# Altium PCB PCB1.PcbDoc
Units mm, origin at the board's own origin, x right, y up, seen from the top; angles counter-clockwise.
Board outline 185 x 200 mm, 2 copper layers (Top Layer, Bottom Layer), stack 1.569 mm thick; 38 components, 31 nets, 171 pads, 246 vias.
Unrouted connection lines stored in the file: 13.
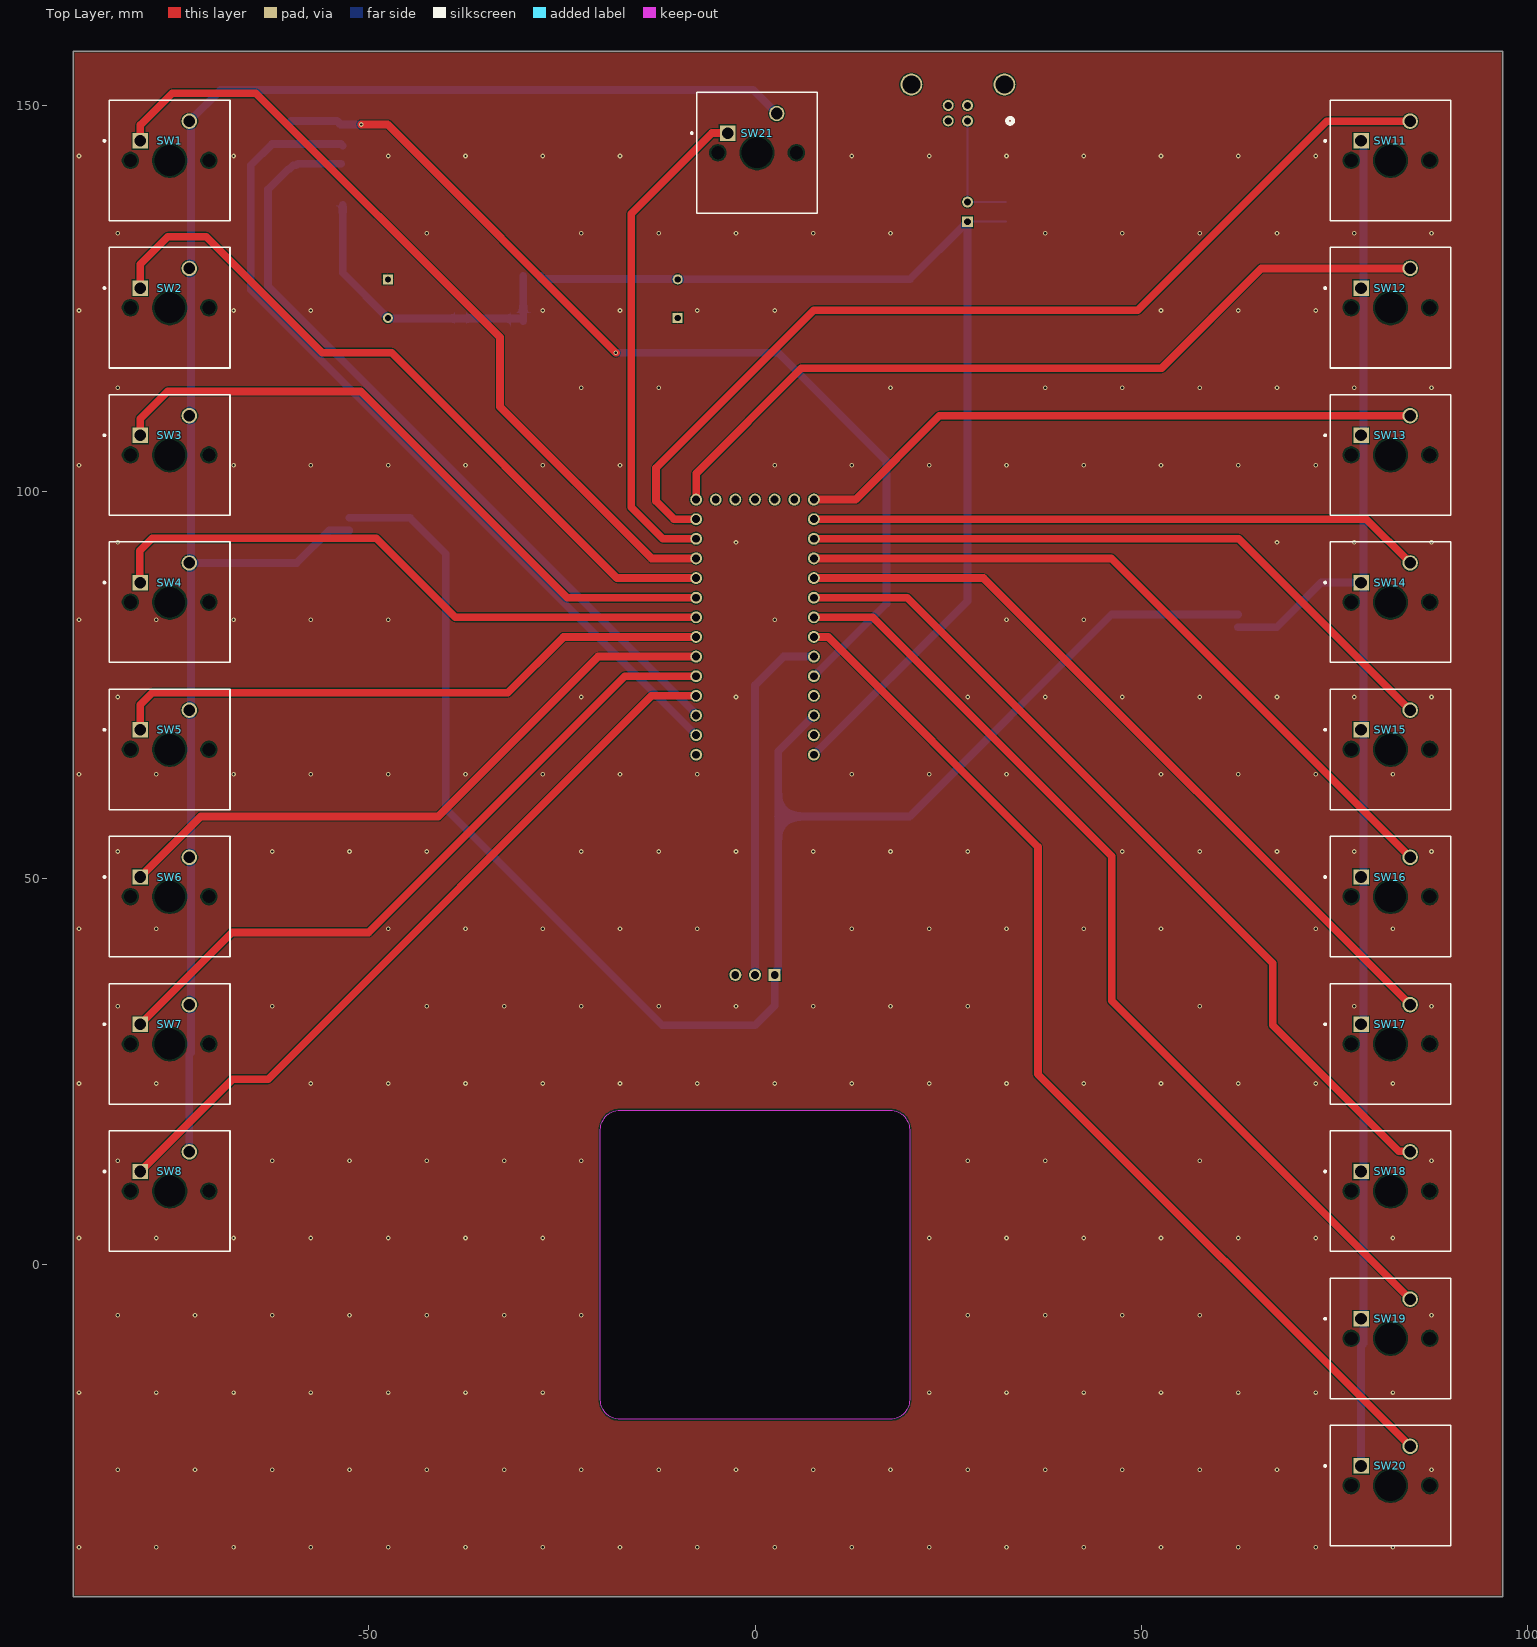
[diagram p0: Top Layer view]
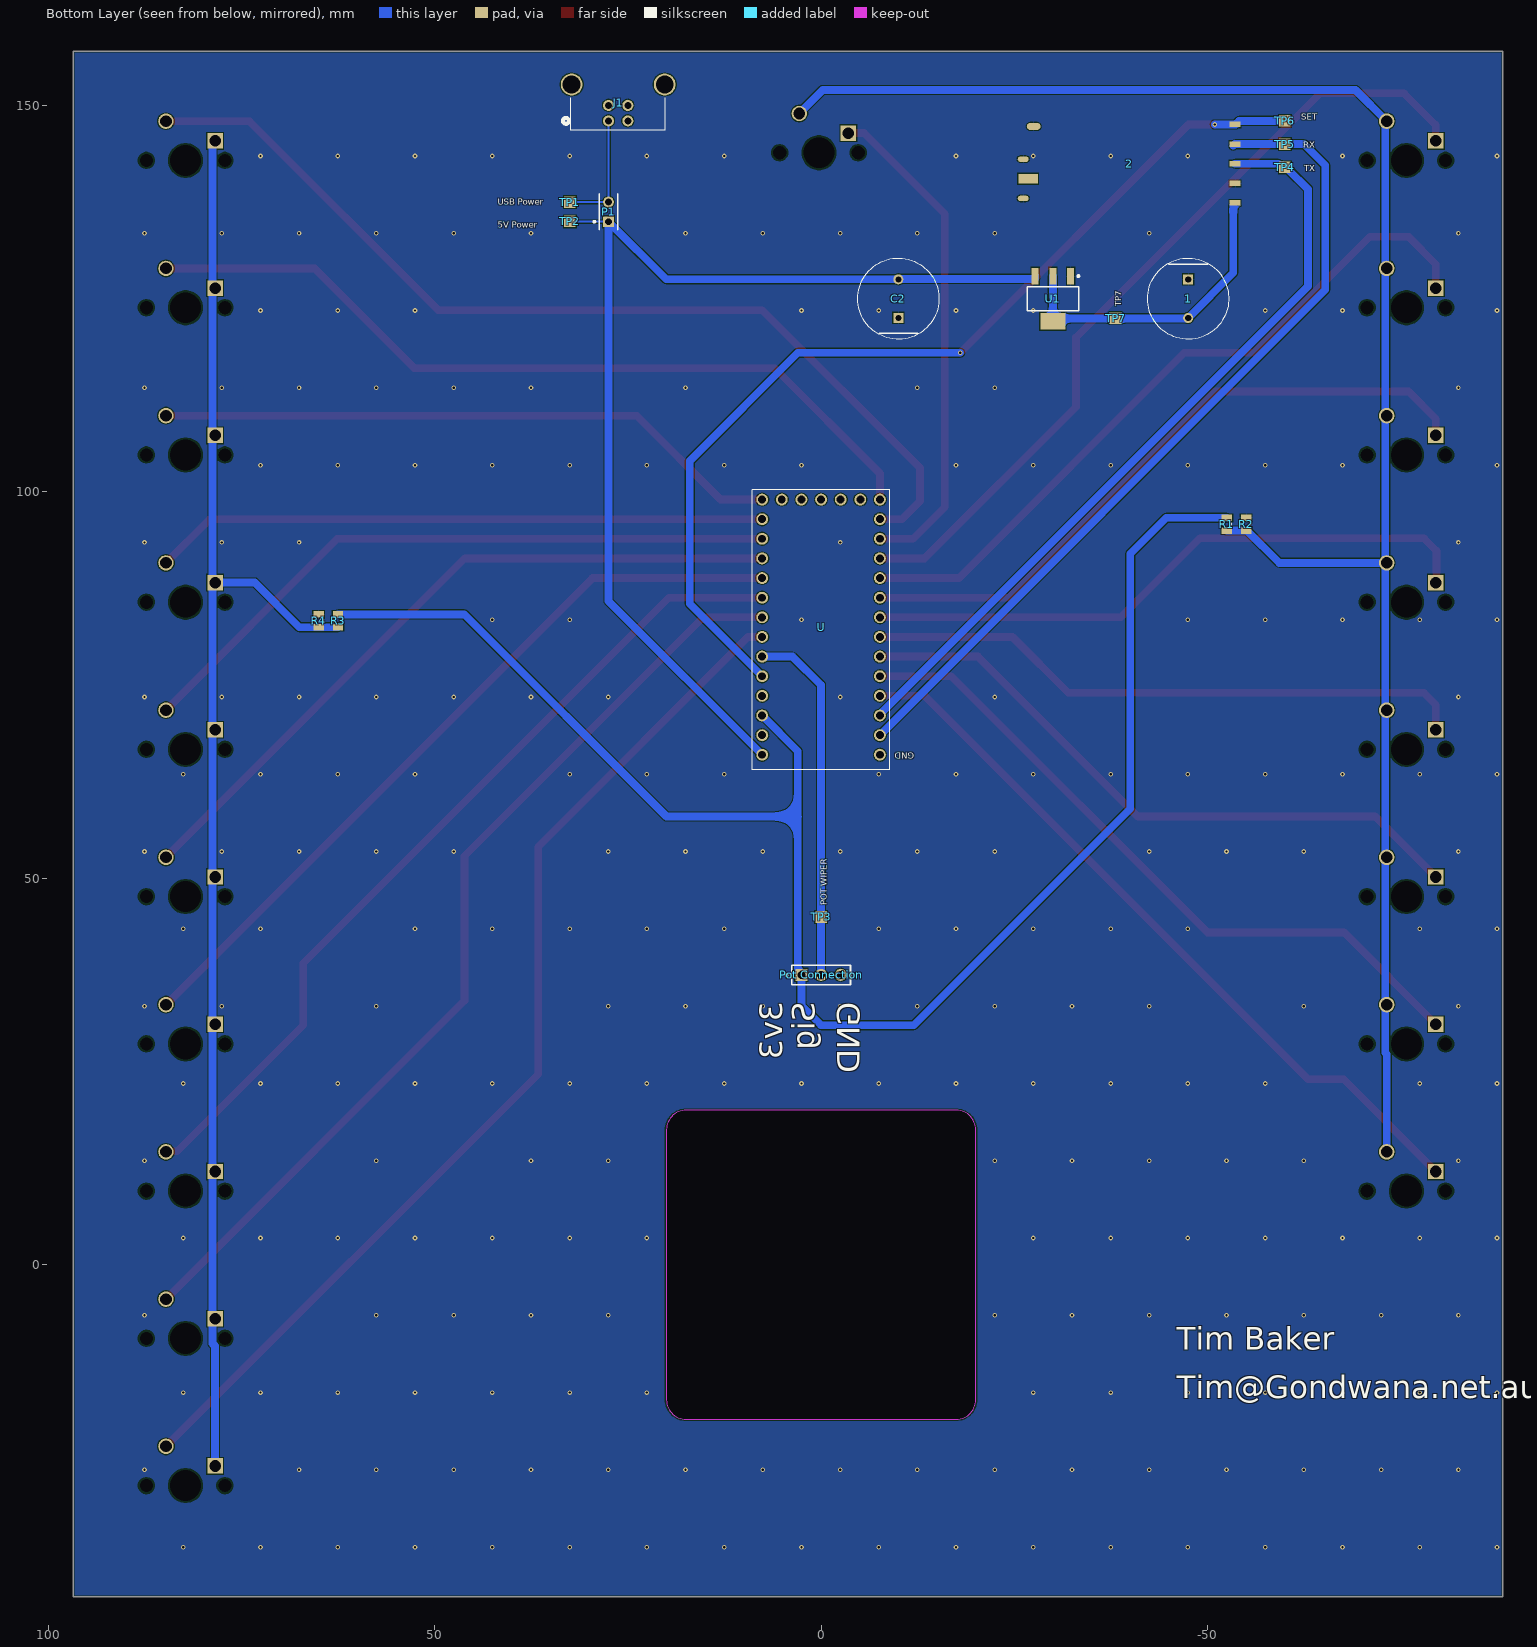
[diagram p1: Bottom Layer view, seen from below]
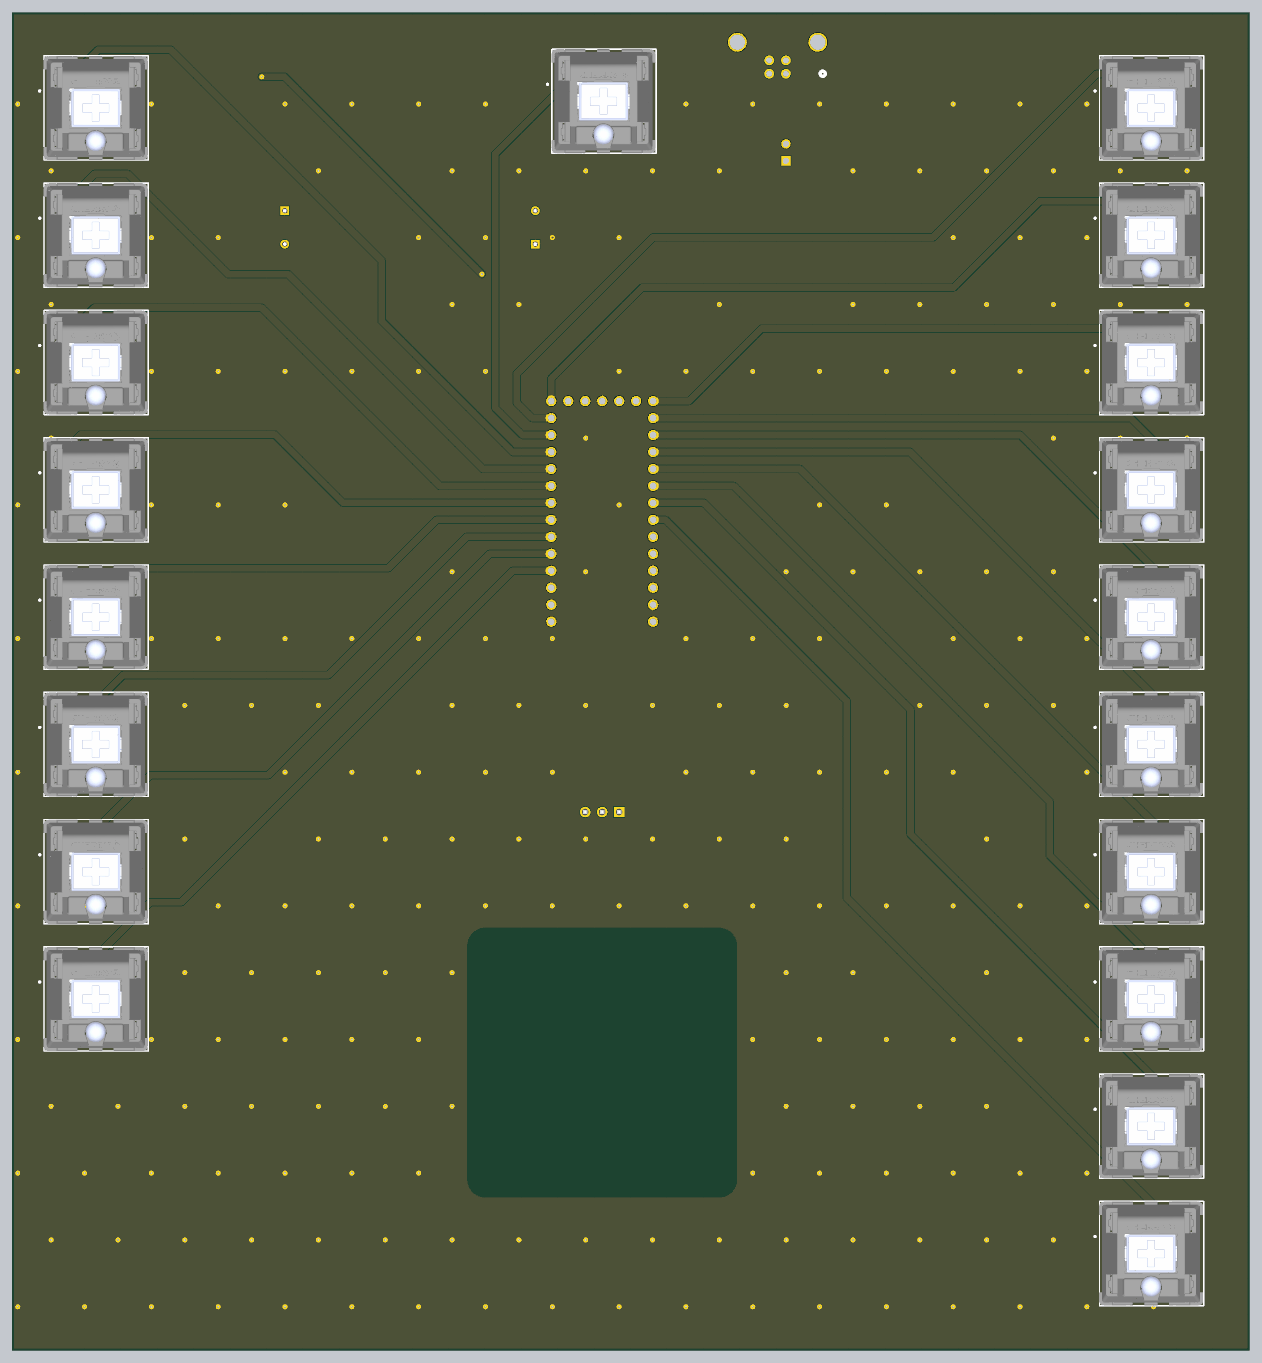
[diagram p2: 3D render of the assembled board from above, using the file's embedded part models]

## Layer stack, top to bottom
Top Solder: solder mask 0.0254, SM-001, Dk 4
Top Layer: signal copper 0.035
Dielectric 1: core 1.4986, Core-043, Dk 4.3
Bottom Layer: signal copper 0.035
Bottom Solder: solder mask 0.0254, SM-001, Dk 4

## Board outline
-88.227,-42.97 -88.227,157.03 96.773,157.03 96.773,-42.97
cut-out: -20,17.46 cw(c-17.46,17.46) -17.46,20 17.46,20 cw(c17.46,17.46) 20,17.46 20,-17.46 cw(c17.46,-17.46) 17.46,-20 -17.46,-20 cw(c-17.46,-17.46) -20,-17.46

## Design rules (kind name [scope] priority, off if disabled: settings)
BoardOutlineClearance [All] p1: gap=0.2 ignorepadtopadclearanceinfootprint=FALSE
Clearance [All] p1: gap=0.127 ignorepadtopadclearanceinfootprint=FALSE except(0.25: Arc-Hole Track-Hole SMDPad-Hole THPad-Hole Via-Hole Fill-Hole Poly-Hole Region-Hole Text-Hole; 0.254: Arc-Poly)
ComponentClearance [All] p1: gap=0.127 collisioncheckmode=3 verticalgap=0.127 showdistances=TRUE
DiffPairsRouting [All] p1: maxlimit=0.254 minlimit=0.127 mostfreqgap=0.127 toplayer_minwidth=0.127 toplayer_maxwidth=25.4 toplayer_prefwidth=0.127 bottomlayer_minwidth=0.127 bottomlayer_maxwidth=25.4 bottomlayer_prefwidth=0.127 maxuncoupledlength=12.7
Height [All] p1: minheight=0 maxheight=1816.048 prefheight=12.7
HoleSize [All] p1: absolutevalues=TRUE maxlimit=6.3 minlimit=0.3 maxpercent=80.000 minpercent=20.000
HoleToHoleClearance [All] p1: gap=0.25 allowstackedmicrovias=FALSE
MinimumAnnularRing [All] p1: minimumring=0.076
MinimumSolderMaskSliver [All] p1: minsoldermaskwidth=0
PlaneClearance [All] p1: clearance=0.127
PlaneConnect PlaneConnectPowerPads [InPadClass('PowerPads')] p1: planeconnectstyle=Direct reliefexpansion=0.508 reliefentries=4 reliefconductorwidth=0.254 reliefairgap=0.254
PlaneConnect [All] p2: pad.planeconnectstyle=Relief pad.reliefexpansion=0.3 pad.reliefentries=4 pad.reliefconductorwidth=0.127 pad.reliefairgap=0.127 via.planeconnectstyle=Direct via.reliefexpansion=0.3 via.reliefentries=4 via.reliefconductorwidth=0.127 via.reliefairgap=0.127
PolygonConnect PolygonConnectPowerPads [All vs (InPadClass('PowerPads'))] p1: connectstyle=Direct reliefconductorwidth=0.254 reliefentries=4 polygonreliefangle="90 Angle" airgapwidth=0.254
PolygonConnect [All] p2: thpad.connectstyle=Relief thpad.reliefconductorwidth=0.127 thpad.reliefentries=4 thpad.polygonreliefangle="90 Angle" thpad.airgapwidth=0.127 smdpad.connectstyle=Relief smdpad.reliefconductorwidth=0.127 smdpad.reliefentries=4 smdpad.polygonreliefangle="90 Angle" smdpad.airgapwidth=0.127 via.connectstyle=Direct via.reliefconductorwidth=0.127 via.reliefentries=4 via.polygonreliefangle="90 Angle" via.airgapwidth=0.127
RoutingVias [All] p1: holewidth=0.3 width=0.6 viastyle="Through Hole" minholewidth=0.3 minwidth=0.6 maxholewidth=0.6 maxwidth=6.6
SilkToSilkClearance [All] p1: silktosilkclearance=0
SilkToSolderMaskClearance [IsPad] p1: minsilkscreentomaskgap=0.127 clearancetoexposedcopper=TRUE
SolderMaskExpansion [All] p1: expansion=0.075 istentingtop=FALSE
Width [All] p1: maxlimit=25.4 minlimit=0.127 preferedwidth=1 minimp=50.000000 maximp=50.000000 favimp=50.000000
20 further rules are at their usual default settings.

## Components (designator, comment, footprint, x,y, rotation, side; value= is the part's Value field where it differs from the comment)
1 "EEUFK1C102" FP-RAD-TH-D_10_0_5-L_16_1-MFG -47.5,125 r270 bottom
2 "HC-12 433MHz module footprint   MCHFIX is for mechanical fix pin which is NC but on this file connected to GND   https://github.com/meendiz/hc-12_si4463/" HC-12_FOOTPRINT -52.29,147.54 r0 bottom
C2 "EEUFK1C102" FP-RAD-TH-D_10_0_5-L_16_1-MFG -10,125 r90 bottom
J1 "MC32596" CONN4_MC32596_MTC 27.5,148 r0 bottom
P1 "5-146280-2" TECO-5-146280-2_V 27.5,136.23 r90 bottom
"Pot Connection" "90120-0763" FP-90120-0763-MFG 0,37.5 r180 bottom
R1 "CRCW08050000Z0EA" RESC2013X50X30LL20T20 -52.5,95.825 r90 bottom
R2 "NF" RESC2013X50X30LL20T20 -55,95.825 r270 bottom
R3 "CRCW08050000Z0EA" RESC2013X50X30LL20T20 62.5,83.325 r90 bottom
R4 "NF" RESC2013X50X30LL20T20 65,83.325 r270 bottom
SW1 "KEYSW-SPST-2" CHRY-MX1A-11NW_V -75.727,142.88 r0 top
SW2 "KEYSW-SPST-2" CHRY-MX1A-11NW_V -75.727,123.83 r0 top
SW3 "KEYSW-SPST-2" CHRY-MX1A-11NW_V -75.727,104.78 r0 top
SW4 "KEYSW-SPST-2" CHRY-MX1A-11NW_V -75.727,85.73 r0 top
SW5 "KEYSW-SPST-2" CHRY-MX1A-11NW_V -75.727,66.68 r0 top
SW6 "KEYSW-SPST-2" CHRY-MX1A-11NW_V -75.727,47.63 r0 top
SW7 "KEYSW-SPST-2" CHRY-MX1A-11NW_V -75.727,28.58 r0 top
SW8 "KEYSW-SPST-2" CHRY-MX1A-11NW_V -75.727,9.53 r0 top
SW11 "KEYSW-SPST-2" CHRY-MX1A-11NW_V 82.219,142.88 r0 top
SW12 "KEYSW-SPST-2" CHRY-MX1A-11NW_V 82.219,123.83 r0 top
SW13 "KEYSW-SPST-2" CHRY-MX1A-11NW_V 82.219,104.78 r0 top
SW14 "KEYSW-SPST-2" CHRY-MX1A-11NW_V 82.219,85.73 r0 top
SW15 "KEYSW-SPST-2" CHRY-MX1A-11NW_V 82.219,66.68 r0 top
SW16 "KEYSW-SPST-2" CHRY-MX1A-11NW_V 82.219,47.63 r0 top
SW17 "KEYSW-SPST-2" CHRY-MX1A-11NW_V 82.219,28.58 r0 top
SW18 "KEYSW-SPST-2" CHRY-MX1A-11NW_V 82.219,9.53 r0 top
SW19 "KEYSW-SPST-2" CHRY-MX1A-11NW_V 82.219,-9.52 r0 top
SW20 "KEYSW-SPST-2" CHRY-MX1A-11NW_V 82.219,-28.57 r0 top
SW21 "KEYSW-SPST-2" CHRY-MX1A-11NW_V 0.273,143.881 r0 top
TP1 "Test Point Square" "New footprint 1" 32.5,137.5 r90 bottom
TP2 "Test Point Square" "New footprint 1" 32.5,135 r90 bottom
TP3 "Test Point Square" "New footprint 1" 0,45 r90 bottom
TP4 "Test Point Square" "New footprint 1" -60,142 r90 bottom
TP5 "Test Point Square" "New footprint 1" -60,145 r90 bottom
TP6 "Test Point Square" "New footprint 1" -60,148 r90 bottom
TP7 "Test Point Square" "New footprint 1" -38.102,122.485 r90 bottom
U "DEV-15583" MODULE_DEV-15583 0,82.5 r0 bottom
U1 "3.3V Regulator 1A output" SOT229P700X180-4N -30,125 r270 bottom

## Footprints (in the part's own frame and the unit in brackets; to place one, negate y for a bottom-side part, rotate by r counter-clockwise, add the part's x,y. Pads: shape width x height; smd on the part's side, far side on the other; paste and mask are expansions set on the pad)
CHRY-MX1A-11NW_V [mm] "THD, 2-Leads, Body 15.6x15.6mm"
  rect 2x2 hole 1.499 paste+0: 1(-3.81,2.54)
  round 2 hole 1.499 paste+0: 2(2.54,5.08)
  round 0 hole 3.988 unplated paste+0: MH1(0,0)
  round 0 hole 1.702 unplated paste+0: MH2(-5.08,0) MH3(5.08,0)
  silkscreen extent -8.57,-7.8 7.8,7.8, body extent -7.87,-7.81 7.73,7.79, height 15.6
CONN4_MC32596_MTC [mil]
  round 56 hole 36 mask+0: 1(0,0) 2(-98.43,0) 3(-98.43,-78.74) 4(0,-78.74)
  round 111 hole 91: 5(-286.22,-185.43) 6(187.8,-185.43)
  silkscreen extent -290,-117 232,48, body extent 0,0 10,10, height 10
FP-90120-0763-MFG [mm]
  rect 1.55x1.55 hole 1 paste-1000 mask+0: 1(-2.54,0)
  round 1.55 hole 1 paste-1000 mask+0: 2(0,0) 3(2.54,0)
  silkscreen extent -4.58,-1.27 3.81,1.27, body extent -3.81,-1.25 3.81,1.25, height 9.65
FP-RAD-TH-D_10_0_5-L_16_1-MFG [mm]
  rect 1.3x1.3 hole 0.8 paste-1000 mask+0: 1(-2.5,0)
  round 1.3 hole 0.8 paste-1000 mask+0: 2(2.5,0)
  silkscreen extent -5.25,-5.25 5.25,5.25, body extent -5,-5.01 4.99,4.99, height 17.5
HC-12_FOOTPRINT [mil]
  rect 100x50 smd: ANT(1003.54,276.77)
  rect 56x28 smd: GND(-50,300) RXD(-50,200) SET(-50,0) TXD(-50,100) VCC(-50,400)
  rrect100% 56x28 smd: GND1(1028.74,376.77) GND2(1028.74,176.77)
  rrect100% 70x36 smd: MCHFIX(975.59,9.84)
MODULE_DEV-15583 [mm]
  round 1.53 hole 1.02: 0(-7.62,13.97) 1(-7.62,11.43) 2(-7.62,8.89) 3(-7.62,6.35) 3.3V_1(-2.54,-16.51) 3.3V_2(7.62,11.43) 4(-7.62,3.81) 5(-7.62,1.27) 6(-7.62,-1.27) 7(-7.62,-3.81) 8(-7.62,-6.35) 9(-7.62,-8.89) 10(-7.62,-11.43) 11(-7.62,-13.97) 12(-7.62,-16.51) 13(7.62,-16.51) 14(7.62,-13.97) 15(7.62,-11.43) 16(7.62,-8.89) 17(7.62,-6.35) 18(7.62,-3.81) 19(7.62,-1.27) 20(7.62,1.27) 21(7.62,3.81) 22(7.62,6.35) 23(7.62,8.89) G1(-7.62,16.51) G2(0,-16.51) G3(7.62,13.97) ON-OFF(5.08,-16.51) PGM(2.54,-16.51) VBAT(-5.08,-16.51) VIN(7.62,16.51)
  silkscreen extent -8.89,-17.78 8.89,18.48
"New footprint 1" [mm]
  rect 1.5x1.5 smd: 1(0,0)
RESC2013X50X30LL20T20 [mm] "Chip Resistor, 2-Leads, Body 2.00x1.25mm, IPC High Density"
  rect 0.85x1.35 smd: 1(-0.825,0) 2(0.825,0)
  silkscreen extent -0.1,-0.58 0.1,0.58, body extent -1.1,-0.72 1.1,0.72, height 0.5
SOT229P700X180-4N [mm] "SOT223, 4-Leads, Body 6.50x7.01mm (avg), Pitch 2.29mm, IPC Medium Density"
  rect 2.15x0.9 smd: 1(-2.925,2.29) 2(-2.925,0) 3(-2.925,-2.29)
  rect 2.15x3.25 smd: 4(2.925,0)
  silkscreen extent -3.05,-3.35 1.55,3.41, body extent -3.5,-3.35 3.5,3.35, height 1.8
TECO-5-146280-2_V [mm] "Connector, 2-Leads, Body 4.67x2.34mm, Pitch 2.54mm"
  rect 1.4x1.4 hole 0.89: 1(-1.27,0)
  round 1.4 hole 0.89: 2(1.27,0)
  silkscreen extent -2.33,-1.17 2.33,1.94, body extent -2.34,-1.17 2.34,1.17, height 5.33

## Part data
1 C2: library part CMP-05427-001094-1, "Aluminum Electrolytic Capacitors (Radial Lead Type) AEC-Q200 Qualified 1000uF ±20% 16V", Capacitance=1mF, Case/Package=Radial, Dielectric Material=Aluminium, Max Operating Temperature=105°C, Min Operating Temperature=-55°C, Ripple Current=1.24A, Tolerance=20%, Voltage=16V, Construction=RADIAL, Diameter=10mm, Height=16mm, Impedance=49mR, Lead Diameter=0.6mm, Lead Pitch=5mm, Life (Hours)=4000Hour, Mount="Through Hole", Number of Pins=2, packaging=Bulk, Radiation Hardening=No, REACH SVHC="No SVHC", RoHS Compliant=Yes, Series="FK Radial", Termination=Radial, Voltage Rating=16V, Voltage Rating (DC)=16V
2: library part HC-12_FOOTPRINT, DeviceSetName=HC-12_FOOTPRINT, GateName_1=G$1, LibraryName=hc12_433mhz, Package=HC-12_FOOTPRINT, SymbolName_1=HC-12_FOOTPRINT
J1: "No Description Available", Mfr_Name=Multicomp, Copyright="Copyright (C) 2023 Ultra Librarian. All rights reserved.", Manufacturer_Part_Number=MC32596, RefDes=RefDes, Type=DEV
P1: library part CMP-2000-07492-1, "Male Header, Pitch 2.54 mm, 1 x 2 Position, Height 8.21 mm, Tail Length 3.05 mm, -65 to 105 degC, RoHS, Bulk", Case\/Package=100, Colour=Black, Current Rating=3A, Flammability Rating=UL94V-0, High Temperature Housing=Yes, manufacturer="TE Connectivity", Max Current Rating=5A, Max Operating Temperature=105degC, Min Operating Temperature=-65degC, Package Description="Male Header, Pitch 2.54 mm, 1 x 2 Position, Height 8.21 mm, Tail Length 3.05 mm", Package Quantity=500, Approvals=CSA, Board Standoff=No(Without), Connector Type=Header, Contact Gender=Male, Contact Material=CopperAlloy, Contact Mating Length=0.23inch, Contact Plating=Matte, Contact Protection=No(Without), Contact Shape=Square, Datasheet URL=http://www.te.com/commerce/DocumentDelivery/DDEController?Action=showdoc&DocId=Customer+Drawing%7F146280%7FH1%7Fpdf%7FEnglish%7FENG_CD_146280_H1.pdf%7F5-146280-2, Datasheet Version="Rev. H1, 08/2016", Depth=2.34mm, Gasket=No(Without), High Speed Serial Data Connector=No, Housing Colour=Black, Housing Material=Polymer, Keyed=No, Length=4.67mm, Manufacturer URL=http://www.te.com/, Mating Alignment=No(Without), Mating Connector Lock=No(Without), Mating Post Length=0.23inch, Mount=ThroughHole, Mounting Technology=ThroughHole, Number of Contacts=2, Number of Positions=2, Number of Rows=1, Orientation=Straight, Package Reference=5-146280-2, packaging=Carton, Panel Mount Retention=No(Without), PCB Mount Retention=Without, PCB Mounting Orientation=Vertical, PCB Thickness=0.063inch, Pitch=2.54mm, Radiation Hardening=No, RoHSCompliant=true, Row Spacing=2.54mm, Selectively Loaded=No(Without), Stabilizers=No(Without), Termination=ThroughHole, Termination Post Length=0.12inch
"Pot Connection": library part CMP-04776-000084-1, "CONN HEADER VERT 3POS 2.54MM", Current Rating=3A, manufacturer=Molex, Temperature="-55°C to +125°C", Temperature Range High=+125°C, Temperature Range Low=-55°C, Voltage Rating=350V, Automotive=No, Category=Conn, ComponentLink2Description=Datasheet, ComponentLink2URL=https://www.molex.com/webdocs/datasheets/pdf/en-us/0901200763_PCB_HEADERS.pdf, Conn Gender=Male, Conn Orientation=Vertical, Contact Material=Gold,Nickel, Device Class L1=Connectors, Device Class L2="Headers and Wire Housings", Device Class L3=unset, Digikey Description="CONN HEADER VERT 3POS 2.54MM", Footprint Url=https://www.molex.com/pdm_docs/sd/901200763_sd.pdf, Height=5.8mm, Lead Free=Yes, Manufacturer Part Number=90120-0763, Mouser Description="Board-To-Board Connector, C-Grid III 90120 Series, Through Hole, Header, 3, 2.54 mm", Number of Contacts=3, Number of Rows=1, Octopart=https://octopart.com/90120-0763-molex-655433, Package=90120-0763, Pitch=2.54mm, RoHS=TRUE
R1 R3: library part CMP-2001-04896-1, manufacturer="Vishay Dale", Part Number=CRCW08050000Z0EA
R2 R4: library part CMP-2001-04896-1, manufacturer="Vishay Dale", Part Number=CRCW08050000Z0EA
TP1 TP2 TP3 TP4 TP5 TP6 TP7: library part CMP-001-0001-1, "1.5mm Square testpoint"
U: "RT1062 Teensy 4.0 i.MX ARMÂ® CortexÂ®-M7 MPU Embedded Evaluation Board", Package=None, Digi-Key_Part_Number=1568-DEV-15583-ND, Digi-Key_Purchase_URL=https://www.digikey.com/product-detail/en/sparkfun-electronics/DEV-15583/1568-DEV-15583-ND/10384551?utm_source=snapeda&utm_medium=aggregator&utm_campaign=symbol, MF="SparkFun Electronics", MP=DEV-15583, SnapEDA_Link=https://www.snapeda.com/parts/DEV-15583/SparkFun%20Electronics/view-part/4001229/?ref=snap
U1: library part AMS1117-3.3

## Via types
v1: diameter 0.6, hole 0.3, Top Layer to Bottom Layer, 246 vias

## Nets (pads, with @x,y where several pads share a name; then routed paths per layer and width w, separated by ;. In a path a pad name is that pad's centre, name@x,y a point inside that pad or via, vN(x,y) a via of type N, cw(c..) or ccw(c..) an arc to the next point about the centre after c; other vN are vias at no path point)
3V3: 1.2 2.VCC TP7.1 U1.2 U1.4 | length 40.6
  Bottom Layer w1: 2.VCC@-53.34,137.16 -53.34,128.34 1.2 -47.443,122.443 -30.368,122.443 U1.4 U1.2
3V3_MCU: "Pot Connection.1" R1.2 R3.2 U.3.3V_2 | length 212.5
  Bottom Layer w1: R1.2 -44.65,96.65 -40,92 -40,59 -12,31 0,31 2.54,33.54 2.54,37.5 2.815,37.775 2.815,38.176 2.929,38.29 ; 3,38.361 3,58 ; U.3.3V_2 3,66.45 3,58 ; R3.2 46.15,84.15 20,58 3,58
+5: C2.2 P1.1 TP2.1 U1.3 U.VIN | length 140.9
  Bottom Layer w0.254: P1.1 32.46,134.96 TP2.1
  Bottom Layer w1: U1.3 -27.71,127.607 -27.66,127.557 -10.057,127.557 C2.2 20.04,127.5 P1.1 27.5,85.87 U.VIN
GND: 1.1 2.GND 2.GND1 2.GND2 2.MCHFIX "Pot Connection.3" C2.1 J1.3 R2.1 R4.1 U1.1 U.G1 U.G2 U.G3
  other v1: -87.465,-36.536 -77.465,-36.536 -67.465,-36.536 -57.465,-36.536 -47.465,-36.536 -37.465,-36.536 -27.465,-36.536 -17.465,-36.536 -7.465,-36.536 2.535,-36.536 12.535,-36.536 22.535,-36.536 32.535,-36.536 42.535,-36.536 52.535,-36.536 62.535,-36.536 72.535,-36.536 82.535,-36.536 -82.465,-26.536 -72.465,-26.536 -62.465,-26.536 -52.465,-26.536 -42.465,-26.536 -32.465,-26.536 -22.465,-26.536 -12.465,-26.536 -2.465,-26.536 7.535,-26.536 17.535,-26.536 27.535,-26.536 37.535,-26.536 47.535,-26.536 57.535,-26.536 67.535,-26.536 87.535,-26.536 -87.465,-16.536 -77.465,-16.536 -67.465,-16.536 -57.465,-16.536 -47.465,-16.536 -37.465,-16.536 -27.465,-16.536 22.535,-16.536 32.535,-16.536 42.535,-16.536 52.535,-16.536 62.535,-16.536 72.535,-16.536 82.535,-16.536 -82.465,-6.536 -72.465,-6.536 -62.465,-6.536 -52.465,-6.536 -42.465,-6.536 -32.465,-6.536 -22.465,-6.536 27.535,-6.536 37.535,-6.536 47.535,-6.536 57.535,-6.536 87.535,-6.536 -87.465,3.464 -77.465,3.464 -67.465,3.464 -57.465,3.464 -47.465,3.464 -37.465,3.464 -27.465,3.464 22.535,3.464 32.535,3.464 42.535,3.464 52.535,3.464 62.535,3.464 72.535,3.464 82.535,3.464 -82.465,13.464 -62.465,13.464 -52.465,13.464 -42.465,13.464 -32.465,13.464 -22.465,13.464 27.535,13.464 37.535,13.464 57.535,13.464 87.535,13.464 -87.465,23.464 -77.465,23.464 -57.465,23.464 -47.465,23.464 -37.465,23.464 -27.465,23.464 -17.465,23.464 -7.465,23.464 2.535,23.464 12.535,23.464 22.535,23.464 32.535,23.464 42.535,23.464 52.535,23.464 62.535,23.464 72.535,23.464 82.535,23.464 -82.465,33.464 -62.465,33.464 -42.465,33.464 -32.465,33.464 -22.465,33.464 -12.465,33.464 -2.465,33.464 7.535,33.464 17.535,33.464 27.535,33.464 57.535,33.464 77.535,33.464 87.535,33.464 -87.465,43.464 -77.465,43.464 -47.465,43.464 -37.465,43.464 -27.465,43.464 -17.465,43.464 -7.465,43.464 12.535,43.464 22.535,43.464 32.535,43.464 42.535,43.464 52.535,43.464 72.535,43.464 82.535,43.464 -82.465,53.464 -62.465,53.464 -52.465,53.464 -42.465,53.464 -22.465,53.464 -12.465,53.464 -2.465,53.464 7.535,53.464 17.535,53.464 27.535,53.464 47.535,53.464 57.535,53.464 67.535,53.464 77.535,53.464 87.535,53.464 -87.465,63.464 -77.465,63.464 -67.465,63.464 -57.465,63.464 -47.465,63.464 -37.465,63.464 -27.465,63.464 -17.465,63.464 -7.465,63.464 12.535,63.464 22.535,63.464 32.535,63.464 52.535,63.464 62.535,63.464 72.535,63.464 82.535,63.464 -82.465,73.464 -22.465,73.464 -2.465,73.464 27.535,73.464 37.535,73.464 47.535,73.464 57.535,73.464 67.535,73.464 77.535,73.464 87.535,73.464 -87.465,83.464 -77.465,83.464 -67.465,83.464 -57.465,83.464 -47.465,83.464 2.535,83.464 32.535,83.464 42.535,83.464 -82.465,93.464 -2.465,93.464 67.535,93.464 77.535,93.464 87.535,93.464 -87.465,103.464 -67.465,103.464 -57.465,103.464 -47.465,103.464 -37.465,103.464 -27.465,103.464 -17.465,103.464 2.535,103.464 12.535,103.464 22.535,103.464 32.535,103.464 42.535,103.464 52.535,103.464 62.535,103.464 72.535,103.464 -82.465,113.464 -22.465,113.464 -12.465,113.464 17.535,113.464 37.535,113.464 47.535,113.464 57.535,113.464 67.535,113.464 77.535,113.464 87.535,113.464 -87.465,123.464 -67.465,123.464 -57.465,123.464 -27.465,123.464 -17.465,123.464 -7.465,123.464 2.535,123.464 52.535,123.464 62.535,123.464 72.535,123.464 -82.465,133.464 -42.465,133.464 -22.465,133.464 -12.465,133.464 -2.465,133.464 7.535,133.464 17.535,133.464 37.535,133.464 47.535,133.464 57.535,133.464 67.535,133.464 77.535,133.464 87.535,133.464 -87.465,143.464 -67.465,143.464 -47.465,143.464 -37.465,143.464 -27.465,143.464 -17.465,143.464 12.535,143.464 22.535,143.464 32.535,143.464 42.535,143.464 52.535,143.464 62.535,143.464 72.535,143.464
IO_2: SW8.1 U.2 | length 97.4
  Top Layer w1: SW8.1 -67.607,24 -63,24 -13.39,73.61 U.2
IO_3: SW7.1 U.3 | length 90.6
  Top Layer w1: SW7.1 -67.657,43 -50,43 -16.85,76.15 U.3
IO_4: SW6.1 U.4 | length 83.7
  Top Layer w1: SW6.1 -71.707,58 -41,58 -20.31,78.69 U.4
IO_5: SW5.1 U.5 | length 78.8
  Top Layer w1: SW5.1 -79.537,72.463 -78,74 -32,74 -24.77,81.23 U.5
IO_6: SW4.1 U.6 | length 81.1
  Top Layer w1: SW4.1 -79.619,88.352 -79.619,92.381 -78,94 -49,94 -38.77,83.77 U.6
IO_7: SW3.1 U.7 | length 86.6
  Top Layer w1: SW3.1 -79.537,109.463 -76,113 -51,113 -24.31,86.31 U.7
IO_8: SW2.1 U.8 | length 94.8
  Top Layer w1: SW2.1 -79.537,129.463 -76,133 -71,133 -56,118 -47,118 -17.85,88.85 U.8
IO_9: SW1.1 U.9 | length 105.9
  Top Layer w1: SW1.1 -79.537,147.463 -75.414,151.586 -64.586,151.586 -33,120 -33,111 -13.39,91.39 U.9
IO_10: SW21.1 U.10 | length 64.8
  Top Layer w1: U.10 -11.93,93.93 -16,98 -16,136 -5.579,146.421 SW21.1
IO_11: SW11.2 U.11 | length 126.6
  Top Layer w1: U.11 -10.47,96.47 -12.8,98.8 -12.8,103.1 7.6,123.5 49.5,123.5 73.96,147.96 SW11.2
IO_12: SW12.2 U.12 | length 106.7
  Top Layer w1: U.12 -7.62,102.38 6,116 52.6,116 65.51,128.91 SW12.2
IO_13: SW13.2 U.13 | length 81.6
  Top Layer w1: U.13 13.01,99.01 23.86,109.86 SW13.2
IO_14: SW14.2 U.14 | length 79.5
  Top Layer w1: U.14 79.1,96.47 SW14.2
IO_15: SW15.2 U.15 | length 86.3
  Top Layer w1: U.15 62.59,93.93 SW15.2
IO_16: SW16.2 U.16 | length 93.2
  Top Layer w1: U.16 46.08,91.39 SW16.2
IO_17: SW17.2 U.17 | length 100
  Top Layer w1: U.17 29.57,88.85 SW17.2
IO_18: SW18.2 U.18 | length 111.5
  Top Layer w1: U.18 19.69,86.31 67,39 67,31 83.307,14.693 84.676,14.693 SW18.2
IO_19: SW19.2 U.19 | length 124.6
  Top Layer w1: U.19 15.23,83.77 46.145,52.855 46.145,34.175 SW19.2
IO_20: SW20.2 U.20 | length 137.8
  Top Layer w1: U.20 9.47,81.23 36.6,54.1 36.6,24.67 SW20.2
IO_21: "Pot Connection.2" TP3.1 U.21 | length 46.6
  Bottom Layer w1: 0,37.5 TP3.1 0,75 3.69,78.69 U.21
IO_22: 2.SET TP6.1 U.22 | length 127
  Top Layer w1: v1(-50.945,147.542) -47.542,147.542 v1(-18,118)
  Bottom Layer w1: TP6.1 -54.087,148 -53.629,147.542 v1(-50.945,147.542) ; v1(-18,118) 3,118 17,104 17,85.53 U.22
IO_23: U.23
NetJ1_1: J1.1 P1.2 TP1.1 | length 15.5
  Bottom Layer w0.254: J1.1 P1.2 TP1.1
NetR1_1: R1.1 R2.2 SW1.2 SW2.2 SW3.2 SW4.2 SW5.2 SW6.2 SW7.2 SW8.2 SW21.2 | length 234.9
  Bottom Layer w1: SW8.2 -73.187,27.24 -72.983,27.444 SW4.2@-72.983,90.81 ; SW4.2 SW4.2@-72.983,90.81 ; R1.1 R2.2 -55.1,95 -59.29,90.81 SW4.2@-72.983,90.81 ; SW21.2 -0.226,152 -69.147,152 SW1.2 -72.996,147.769 -72.996,147.062 -72.983,147.049 SW4.2@-72.983,90.81
NetR3_1: R3.1 R4.2 SW11.1 SW12.1 SW13.1 SW14.1 SW15.1 SW16.1 SW17.1 SW18.1 SW19.1 SW20.1 | length 190
  Bottom Layer w1: R3.1 R4.2 67.5,82.5 73.27,88.27 SW14.1 ; SW20.1 78.409,-10.514 78.74,-10.183 78.74,50.17 78.74,145.089 SW11.1
RX1: 2.TXD TP5.1 U.0 | length 110.7
  Bottom Layer w1: 2.TXD@-53.34,144.78 2.TXD -62.5,145 -65.25,142.25 -65.25,126.16 U.0
TX1: 2.RXD TP4.1 U.1 | length 101.8
  Bottom Layer w1: 2.RXD -59.164,142.46 -59.374,142.25 -59.75,142.25 -60.25,141.75 -60.402,141.75 -63.004,139.148 -63.004,126.597 -7.62,71.213 U.1
pads on no net: 2.ANT J1.2 J1.4 J1.5 J1.6 SW1.MH1 SW1.MH2 SW1.MH3 SW2.MH1 SW2.MH2 SW2.MH3 SW3.MH1 SW3.MH2 SW3.MH3 SW4.MH1 SW4.MH2 SW4.MH3 SW5.MH1 SW5.MH2 SW5.MH3 SW6.MH1 SW6.MH2 SW6.MH3 SW7.MH1 SW7.MH2 SW7.MH3 SW8.MH1 SW8.MH2 SW8.MH3 SW11.MH1 SW11.MH2 SW11.MH3 SW12.MH1 SW12.MH2 SW12.MH3 SW13.MH1 SW13.MH2 SW13.MH3 SW14.MH1 SW14.MH2 SW14.MH3 SW15.MH1 SW15.MH2 SW15.MH3 SW16.MH1 SW16.MH2 SW16.MH3 SW17.MH1 SW17.MH2 SW17.MH3 SW18.MH1 SW18.MH2 SW18.MH3 SW19.MH1 SW19.MH2 SW19.MH3 SW20.MH1 SW20.MH2 SW20.MH3 SW21.MH1 SW21.MH2 SW21.MH3 U.3.3V_1 U.ON-OFF U.PGM U.VBAT

## Polygon pours and split planes (outlines as drawn)
GND on Bottom Layer "GND_L02_P001" (solid, pour order 1): -88,-43 -88,157 97,157 97,-43 -1,-43
GND on Top Layer "GND_L01_P000" (solid, pour order 0): -88,-43 -88,157 97,157 97,-43 -1,-43

## Silkscreen, mask and mechanical layers (free items; w line width, h text height)
Bottom Overlay:
  text "GND" at -5.972,33.997 h5 r270
  text "Sig" at -0.142,33.997 h5 r270
  text "3v3" at 4.028,34 h5 r270
  text "Tim Baker" at -46,-11.972 h5
  text "Tim@Gondwana.net.au" at -46,-18.226 h5
Mechanical 1:
  drawing of 433 lines, arcs and shapes, not listed
BoardOutline:
  the board outline again, w0.254

## Text inside footprints (layer, text, board x,y; h text height)
TP1: Bottom Overlay "USB Power" at 41.85,137.15 h0.8
TP2: Bottom Overlay "5V Power" at 41.85,134.15 h0.8
TP3: Bottom Overlay "POT WIPER" at -0.739,46.547 h0.8 r270
TP4: Bottom Overlay "TX" at -62.487,141.462 h0.8
TP5: Bottom Overlay "RX" at -62.385,144.511 h0.8
TP6: Bottom Overlay "SET" at -62.15,148.15 h0.8
U: Bottom Overlay "GND" at -12.065,66.244 h0.81 r180; Mechanical 13 "GND" at -12.065,66.244 h0.81 r180